# Altium PCB Send_Medicine_Motor.PcbDoc (part 3 of 5)
Units mm, origin at the board's own origin, x right, y up, seen from the top; angles counter-clockwise.
Board outline 150.04 x 100.2 mm, 2 copper layers (Top Layer, Bottom Layer); 273 components, 158 nets, 892 pads, 508 vias.
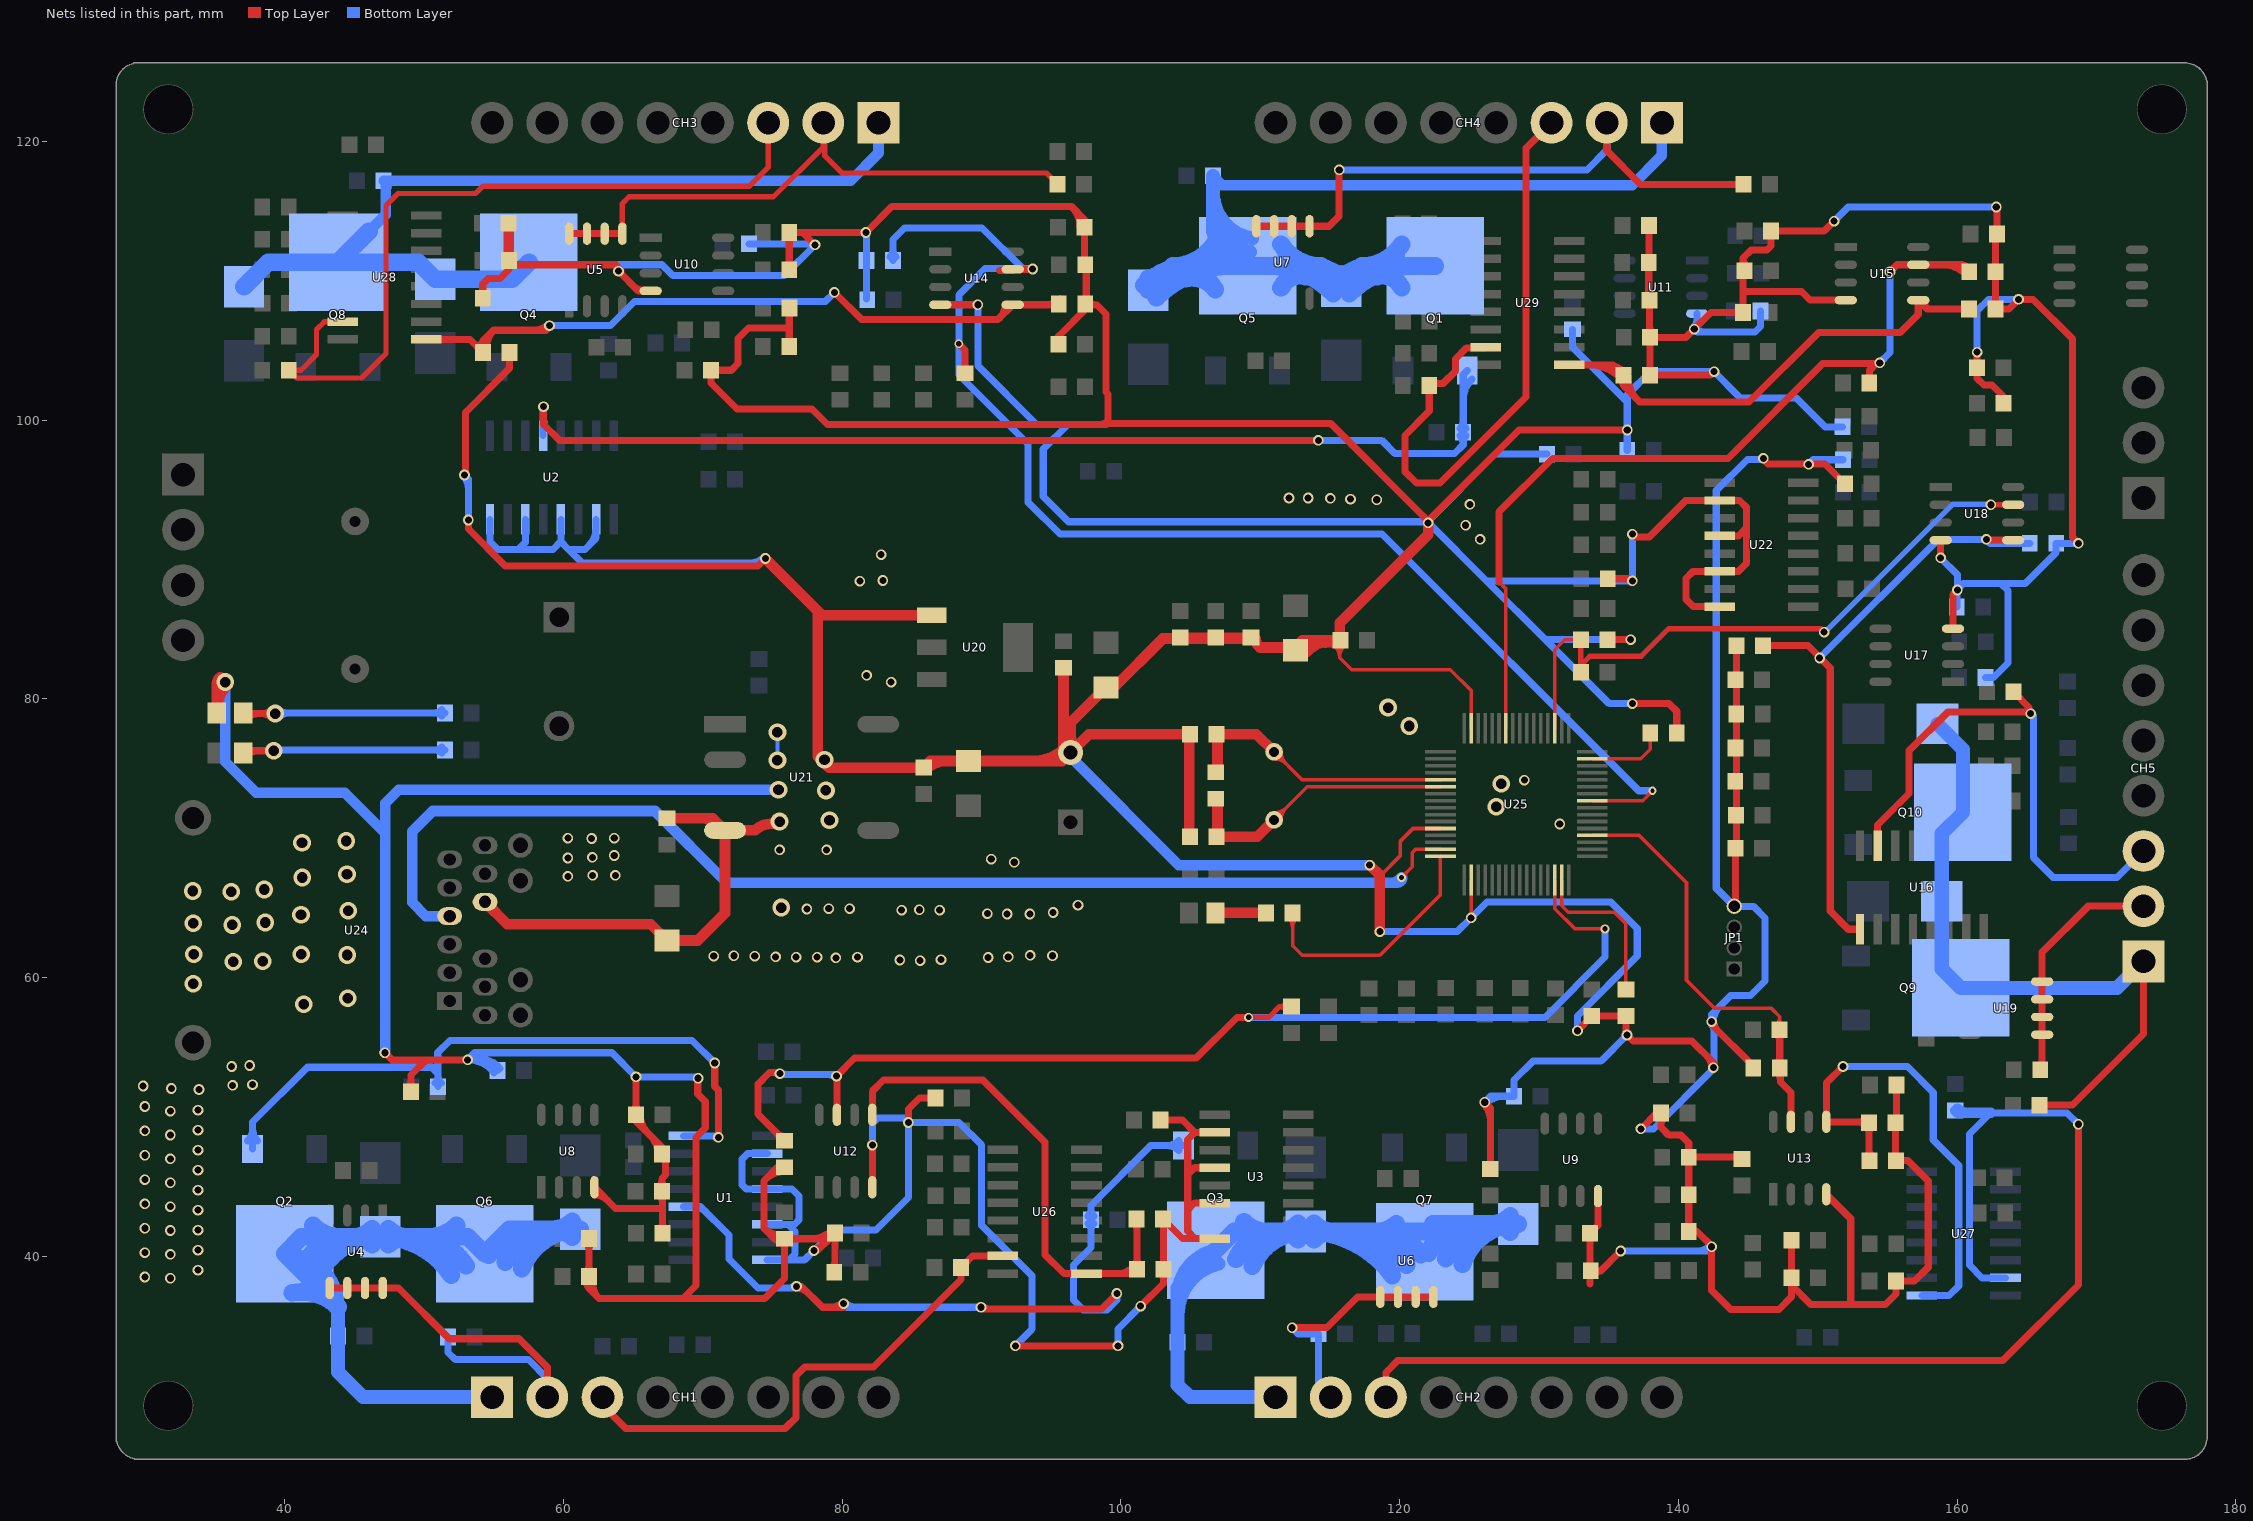
[diagram p3: the nets of this part, all layers, seen from the top]

## Via types
v1: diameter 0.762, hole 0.508, Top Layer to Bottom Layer, 415 vias
v2: diameter 1.27, hole 0.762, Top Layer to Bottom Layer, 47 vias
v3: diameter 0.635, hole 0.381, Top Layer to Bottom Layer, 43 vias
v4: diameter 3.4, hole 3.4, Top Layer to Bottom Layer, 2 vias
v5: diameter 0.6, hole 0.3, Top Layer to Bottom Layer, 1 vias

## Nets (pads, with @x,y where several pads share a name; then routed paths per layer and width w, separated by ;. In a path a pad name is that pad's centre, name@x,y a point inside that pad or via, vN(x,y) a via of type N, cw(c..) or ccw(c..) an arc to the next point about the centre after c; other vN are vias at no path point) (continued)
GND: C1.1 C2.1 C3.1 C4.1 C5.1 C6.1 C7.1 C8.1 C11.1 C12.2 C14.2 C15.1 C16.2 C17.1 C18.1 C19.1 C20.2 C21.1 C22.2 C23.1 C24.1 C25.1 C34.1 C35.1 C36.1 C37.1 C38.1 C39.1 C40.1 C41.1 C42.1 C43.1 C44.1 C45.1 C46.1 C47.1 C48.1 C49.1 C50.1 C51.1 C52.1 C53.1 C54.1 C55.1 C56.1 C57.1 C58.1 C59.1 C60.1 C61.1 C62.1 C63.1 C64.1 C65.1 C66.1 C67.1 C76.1 C77.1 C78.1 C79.1 C80.1 C81.2 C82.1 C83.1 C84.1 JP1.4 LED1.2 R20.2 R24.2 R25.2 R33.2 R34.2 R35.2 R36.2 R45.2 R46.2 R47.2 R48.2 R49.2 R50.2 R51.2 R52.2 R57.2 R58.2 R59.2 R60.2 R69.2 R70.2 R71.2 R72.2 R73.2 R74.2 R75.2 R76.2 R80.2 R82.2 R85.2 R91.1 R94.1 U1.2 U1.4 U1.6 U1.8 U2.2 U2.4 U2.6 U2.8 U3.2 U3.4 U3.6 U3.8 U8.4 U9.4 U10.4 U11.4 U12.4 U13.4 U14.4 U15.4 U17.4 U18.4 U20.1 U21.4 U22.2 U22.4 U22.6 U22.8 U24.10 U25.12 U25.18 U25.63 | length 1308.1
  Top Layer w0.254: R91.1@115.383,83.76 cw(c114.624,83.001) 115.697,83.001 cw(c116.77,83.001) R91.1@116.011,83.76 ; R91.1@115.697,84.201 115.697,82.956 116.561,82.093 123.647,82.093 125.136,80.604 U25.63@125.136,77.9 ; 118.593,67.285 120.066,68.758 120.066,69.799 120.967,70.7 U25.12@122.936,70.7 ; v1(125.136,64.287) U25.18@125.136,67
  Top Layer w0.508: v1(47.193,54.61) 47.701,54.102 v1(53.137,54.102) ; C39.1@48.839,52.069 ccw(c48.3,52.609) 49.063,52.609 ccw(c49.825,52.609) C39.1@49.286,52.069 ; C39.1@49.063,51.816 49.063,53 50.165,54.102 ; v1@52.818,96.153 ccw(c52.418,96.553) 52.984,96.553 ; v1(52.908,96.063) 52.984,96.139 52.984,100.559 56.144,103.718 R75.2@56.144,104.851 ; v1(53.188,92.837) 53.188,92.177 55.829,89.535 73.965,89.535 v1(74.498,90.068) ; R59.2@53.995,108.991 ccw(c53.456,109.53) 54.219,109.53 ccw(c54.982,109.53) R59.2@54.442,108.991 ; R59.2@54.219,108.737 54.219,109.769 54.61,110.16 55.448,110.16 56.093,110.805 R51.2@56.093,111.455 56.398,111.15 63.741,111.15 v1@64.143,110.748 ; C56.1@61.61,38.304 cw(c61.071,37.764) 61.834,37.764 cw(c62.597,37.764) C56.1@62.057,38.304 ; C56.1@61.61,38.811 ccw(c61.071,39.35) 61.834,39.35 ccw(c62.597,39.35) C56.1@62.057,38.811 ; R33.2@61.61,41.022 cw(c61.071,40.482) 61.834,40.482 cw(c62.597,40.482) R33.2@62.057,41.022 ; C56.1@61.647,38.571 ccw(c62.628,38.34) 61.915,37.627 ; R33.2@61.834,41.275 C56.1@61.834,38.557 61.834,37.709 62.56,36.982 ; C56.1@62.141,38.455 ccw(c63.672,38.094) 62.56,36.982 ; U8.4@62.23,44.412 cw(c62.23,43.094) 63.162,44.026 ; U8.4@62.23,44.92 cw(c62.23,44.828) U8.4@62.295,44.893 ; U8.4@62.23,44.958 63.754,43.434 66.99,43.434 67.117,43.561 ; v1(63.957,110.693) 65.38,109.271 U10.4@66.269,109.271 ; C1.1@64.994,50.418 ccw(c64.454,50.958) 65.217,50.958 ccw(c65.98,50.958) C1.1@65.44,50.418 ; 65.026,109.624 ccw(c65.769,110.367) U10.4@65.769,109.317 ; v1@65.227,52.883 v1(65.217,52.873) C1.1@65.217,50.165 65.217,49.693 67.092,47.818 C64.1@67.092,47.346 67.335,47.102 67.335,45.827 67.066,45.558 R47.2@67.066,44.679 67.117,44.628 67.117,43.561 ; C1.1@65.533,50.135 ccw(c67.364,50.135) 66.069,48.84 ; 66.239,48.67 cw(c64.945,47.376) C64.1@66.776,47.376 ; R47.2@66.843,44.425 cw(c66.181,43.763) 67.117,43.763 ; R47.2@66.843,44.932 ccw(c66.303,45.471) 67.066,45.471 ccw(c67.829,45.471) R47.2@67.29,44.932 ; R45.2@66.894,41.909 ccw(c66.354,42.449) 67.117,42.449 ccw(c67.88,42.449) R45.2@67.34,41.909 ; R45.2@67.117,41.656 67.117,43.561 ; 67.117,44.008 cw(c67.706,44.008) R47.2@67.29,44.425 ; v1(69.672,52.781) 69.647,52.756 69.647,51.638 70.18,51.105 70.18,49.2 69.52,48.539 69.52,37.897 68.605,36.982 ; 74.51,45.529 cw(c75.84,44.199) C47.1@75.84,46.08 ; 75.085,41.324 ccw(c75.716,41.955) C49.1@75.874,41.076 ; C49.1@75.602,41.057 ccw(c75.143,40.656) 75.143,41.265 ; C49.1@75.602,41.473 cw(c75.143,41.874) 75.143,41.265 ; C49.1@75.646,41.041 cw(c75.107,40.502) 75.87,40.502 cw(c76.633,40.502) C49.1@76.093,41.041 ; C49.1@75.784,41.576 cw(c75.508,43.123) 74.397,42.012 ; C47.1@75.87,46.396 75.377,46.396 74.397,45.415 74.397,42.012 ; C49.1@76.123,41.041 cw(c76.663,40.502) 76.663,41.265 cw(c76.663,42.028) C49.1@76.123,41.488 ; C42.1@76.21,105.283 76.21,106.604 ; C66.1@76.21,108.077 76.21,106.604 ; C45.1@76.21,110.795 C3.1@76.21,113.462 77.165,113.462 ; 77.796,41.265 ccw(c77.796,43.348) C60.1@79.268,41.875 ; v1(77.978,40.411) 78.222,40.411 C60.1@79.075,41.265 ; v1@77.978,40.538 ccw(c77.978,41.434) 78.611,40.801 ; v1(78.054,112.573) 77.165,113.462 ; 78.901,41.091 cw(c79.492,40.5) C60.1@79.492,41.335 ; C60.1@78.974,41.163 ccw(c78.485,41.651) C60.1@79.176,41.651 ; C60.1@79.022,41.265 ccw(c79.022,42.121) C60.1@79.628,41.516 ; R57.2@79.218,39.115 ccw(c78.555,39.778) 79.492,39.778 ; C60.1@79.268,41.428 cw(c78.729,40.889) 79.492,40.889 cw(c80.255,40.889) C60.1@79.715,41.428 ; R57.2@79.441,38.862 79.492,38.913 C60.1@79.492,41.681 C60.1@79.075,41.265 ; 79.492,39.532 ccw(c80.081,39.532) R57.2@79.664,39.115 ; v1@82.042,48.108 v1(82.169,47.981) U12.4@82.169,44.958 ; v1(84.76,49.606) 84.76,50.571 85.547,51.359 C5.1@86.705,51.359 ; U14.4@87.046,108.28 v1(89.738,108.28) ; v1(92.431,33.579) v1(99.797,33.579) ; R71.2@95.327,105.465 cw(c96.177,105.465) 95.576,106.066 ; R71.2@95.519,106.009 C78.1@97.521,108.011 ; 96.488,115.298 cw(c95.063,113.873) C62.1@97.078,113.873 ; C7.1@97.394,111.201 C62.1@97.394,113.843 97.394,114.391 96.444,115.341 83.591,115.341 v1(81.712,113.462) 77.165,113.462 ; 97.521,108.94 ccw(c98.024,108.94) C78.1@97.668,108.584 ; C7.1@97.521,111.15 97.521,108.255 98.298,108.255 ; C78.1@97.668,108.078 cw(c98.096,107.65) 98.096,108.255 ; C78.1@97.672,108.521 ccw(c98.298,109.125) 98.298,108.255 ; 98.569,99.695 ccw(c98.569,100.262) 98.97,99.861 ; v1(101.422,36.424) 103.058,38.059 R73.2@103.058,39.065 103.058,42.647 104.43,41.275 105.334,41.275 ; R73.2@102.835,38.812 cw(c102.295,38.272) 103.058,38.272 cw(c103.821,38.272) R73.2@103.281,38.812 ; R69.2@102.855,49.784 104.419,49.784 105.308,48.895 ; U3.8@106.728,41.275 105.334,41.275 ; U3.6@106.728,43.815 105.283,43.815 104.8,43.332 ; U3.4@106.728,46.355 105.283,46.355 104.8,45.872 ; U3.2@106.728,48.895 105.308,48.895 ; 121.74,93.067 cw(c121.307,92.634) 121.92,92.634 v1@122.047,92.761 ; v1@126.021,50.964 cw(c124.823,49.766) 126.517,49.766 ; v1@126.102,50.927 cw(c126.068,50.479) 126.517,50.479 ; v1(126.111,51.054) 126.517,50.648 C40.1@126.517,46.264 ; v1(132.766,56.185) 133.782,57.201 R94.1@133.782,57.241 C82.1@136.246,57.241 v1@136.246,56.136 ; 133.665,38.009 R34.2@133.665,41.656 134.239,42.23 U9.4@134.239,44.323 ; C57.1@133.716,38.802 ccw(c133.716,40.164) 134.679,39.201 ; 134.442,38.964 v1(135.865,40.386) ; C38.1@134.91,84.252 v1(136.576,84.252) ; C35.1@134.935,88.621 136.55,88.621 v1(136.703,88.468) ; v1(136.322,55.88) 136.754,55.448 140.97,55.448 142.519,53.899 v1(142.519,53.543) ; v1(136.337,99.289) 128.575,99.289 v1@122.047,92.761 ; v1(136.703,79.654) 139.344,79.654 139.888,79.111 C81.2@139.888,77.546 ; v1(136.703,91.821) 136.906,91.618 137.922,91.618 140.538,94.234 U22.2@142.974,94.234 144.399,94.234 144.882,93.751 144.882,92.253 ; v1(137.312,49.149) 138.455,50.292 C2.1@138.75,50.292 138.75,49.261 139.319,48.692 140.183,48.692 140.752,48.123 R48.2@140.752,47.117 ; C59.1@137.907,113.97 137.907,111.328 R36.2@137.881,111.303 137.881,108.661 R52.2@137.932,108.61 R60.2@137.932,105.994 ; 137.932,106.859 ccw(c138.869,106.859) R60.2@138.206,106.197 ; R76.2@137.958,103.226 142.316,103.226 v1(142.57,103.48) ; R76.2@137.983,103.251 R60.2@137.983,105.943 140.564,105.943 v1(141.148,106.528) 142.342,107.721 R72.2@144.643,107.721 144.643,109.245 ; R46.2@140.752,41.945 cw(c140.752,40.889) 141.498,41.636 ; 142.051,54.367 cw(c141.227,53.543) v1@142.392,53.543 ; v1(142.392,56.845) 142.392,56.642 145.379,53.655 C48.1@145.379,53.518 ; v1@142.519,56.845 ccw(c143.317,56.845) 142.753,56.282 ; U22.8@142.974,86.614 141.097,86.614 140.564,87.147 140.564,88.646 141.072,89.154 U22.6@142.974,89.154 144.323,89.154 144.882,89.713 144.882,92.253 ; U22.4@142.974,91.694 144.323,91.694 144.882,92.253 ; JP1.4@144.018,65.115 144.109,65.206 C25.1@144.109,69.291 144.186,69.367 R85.2@144.186,83.82 ; C50.1@144.435,47.117 R48.2@140.752,47.117 ; C63.1@144.943,110.994 cw(c145.451,111.623) 144.643,111.623 ; v1(146.101,97.257) 146.101,97.18 146.431,96.85 150.536,96.85 C34.1@151.958,95.428 ; C61.1@148.123,41.148 R58.2@148.123,38.456 R58.2@148.123,37.932 ; U13.4@150.622,44.45 152.375,42.697 152.375,36.576 152.4,36.551 ; v1(151.181,114.275) 150.47,113.563 C4.1@146.644,113.563 146.644,112.507 146.355,112.217 145.237,112.217 144.643,111.623 ; U15.4@152.019,108.61 149.454,108.61 148.844,109.22 144.668,109.22 144.643,109.245 ; R74.2@155.585,46.888 C77.1@155.585,49.581 155.661,49.657 C6.1@155.661,52.299 ; R74.2@155.611,46.863 156.489,46.863 157.937,45.415 157.937,39.218 156.947,38.227 R70.2@155.611,38.227 155.611,37.297 154.864,36.551 152.4,36.551 ; v1(158.826,90.119) U18.4@158.826,91.389 ; U17.4@159.715,85.039 159.715,87.503 v1(160.02,87.808) ; v1(161.442,104.877) 161.432,104.866 C36.1@161.432,103.759 161.432,103.007 161.925,102.514 162.509,102.514 163.332,101.691 R82.2@163.332,101.219 ; v1@162.724,115.201 cw(c162.36,114.837) 162.875,114.837 ; v1(162.814,115.291) 162.875,115.23 C8.1@162.875,113.36 162.773,113.259 C54.1@162.773,110.642 162.748,110.617 C79.1@162.748,107.975 163.728,107.975 v1(164.414,108.661) 165.456,108.661 168.3,105.816 168.3,91.567 v1(168.707,91.161) ; 62.56,36.982 68.605,36.982 ; 68.605,36.982 74.447,36.982 75.87,38.405 C49.1@75.87,41.265 ; 74.397,42.012 75.143,41.265 ; 75.143,41.265 C49.1@75.87,41.265 ; C49.1@75.87,41.265 C60.1@79.075,41.265 ; 76.21,106.604 73.279,106.604 72.542,105.867 72.542,104.064 72.06,103.581 R49.2@70.597,103.581 70.597,102.657 72.466,100.787 77.851,100.787 78.943,99.695 98.984,99.695 99.06,99.771 ; 98.298,108.255 98.933,107.62 98.933,102.012 99.085,101.86 99.085,99.797 99.06,99.771 ; 99.06,99.771 115.037,99.771 v1@122.047,92.761 ; 104.8,43.332 104.8,41.808 105.334,41.275 ; 104.8,43.332 104.8,45.872 ; 104.8,45.872 104.8,48.387 105.308,48.895 ; R48.2@140.752,47.117 C65.1@140.752,44.425 R46.2@140.752,41.783 141.351,41.783 142.443,40.691 v1(142.392,40.691) 142.392,37.567 143.764,36.195 147.218,36.195 148.123,37.099 R58.2@148.123,37.932 ; 144.643,109.245 144.643,111.623 ; R58.2@148.123,37.932 149.504,36.551 152.4,36.551
  Top Layer w0.762: LED1.2@35.133,78.994 35.133,80.945 35.128,80.95 35.382,81.204 v2(35.738,81.204) ; LED1.2@35.133,79.131 cw(c37.811,79.131) v2@35.917,81.024 ; 35.133,80.971 cw(c35.971,80.971) v2@35.379,81.563 ; U24.10@54.381,65.43 55.982,63.83 66.269,63.83 C22.2@67.437,62.662 69.647,62.662 71.603,64.618 U21.4@71.603,70.561 ; R35.2@56.068,114.122 56.093,114.097 R51.2@56.093,111.455 ; C21.1@67.437,71.435 70.729,71.435 U21.4@71.603,70.561 ; 69.904,71.435 cw(c69.904,69.763) U21.4@71.087,70.945 ; v1(74.498,90.068) 78.268,86.299 ; v2@75.434,70.955 ccw(c74.916,69.407) 73.762,70.561 U21.4@71.603,70.561 ; C11.1@86.016,74.934 cw(c87.478,73.471) 87.478,75.539 ; U20.1@86.435,85.993 78.574,85.993 78.268,86.299 ; 93.677,75.539 ccw(c93.677,78.861) 96.026,76.512 ccw(c95.14,77.398) 96.393,77.398 ccw(c97.646,77.398) 96.76,76.512 cw(c98.872,78.625) 95.885,78.625 ; C12.2@95.787,75.539 C14.2@89.078,75.539 86.324,75.539 C11.1@85.852,75.067 79.066,75.067 78.268,75.866 78.268,86.299 ; C12.2@95.885,76.653 C15.1@95.885,82.235 ; C17.1@104.267,84.394 C18.1@106.807,84.394 C19.1@109.347,84.394 109.598,84.394 109.664,84.328 ccw(c110.431,84.328) 109.889,83.786 ; C24.1@104.902,70.104 104.902,77.47 97.718,77.47 C12.2@96.393,76.145 96.393,78.283 C16.2@98.933,80.823 99.517,80.823 103.022,84.328 C19.1@109.347,84.328 ; 109.985,83.69 112.522,83.69 113.033,84.201 115.697,84.201 115.697,85.446 122.047,91.796 v1(122.047,92.634) ; C20.2@113.368,83.394 cw(c115.317,81.445) R91.1@115.317,84.201 ; 114.68,84.03 cw(c114.995,82.857) R91.1@115.602,83.909 ; v1(117.856,68.072) 118.593,67.335 118.593,67.285 v1(118.593,63.297)
  Bottom Layer w0.305: v2(75.362,75.59) v2(75.362,77.597)
  Bottom Layer w0.508: v1@52.818,95.973 cw(c51.927,95.082) 53.188,95.082 ; v1(52.908,96.063) 53.188,95.783 v1(53.188,92.837) ; 54.178,54.102 cw(c54.178,52.505) C41.1@55.437,53.488 ; 54.695,53.931 ccw(c55.286,54.521) C41.1@55.286,53.686 ; U2.8@54.737,92.885 54.737,91.288 55.296,90.729 56.769,90.729 ; C41.1@54.767,53.858 cw(c54.279,53.37) C41.1@54.97,53.37 ; C41.1@55.037,53.175 ccw(c53.137,51.691) v1(53.137,54.102) ; C41.1@55.286,53.34 54.524,54.102 v1(53.137,54.102) ; U2.6@57.277,92.885 57.277,91.237 56.769,90.729 ; U2.4@59.817,92.885 59.817,91.288 ; 61.894,91.079 ccw(c60.888,92.085) U2.2@62.311,92.085 ; U2.2@62.357,92.885 62.357,91.542 61.544,90.729 60.376,90.729 ; v1(63.957,110.693) 63.957,111.15 67.081,111.15 67.869,110.363 75.844,110.363 v1(78.054,112.573) 77.978,112.649 C58.1@73.315,112.649 ; 69.145,52.873 cw(c69.145,52.254) v1@69.582,52.691 ; v1(69.672,52.781) 69.581,52.873 v1(65.217,52.873) 63.48,54.61 53.645,54.61 v1(53.137,54.102) ; 73.456,89.764 ccw(c73.456,91.111) v1@74.408,90.158 ; v1@74.374,90.095 cw(c73.965,90.182) 73.965,89.764 ; v1@74.483,89.942 ccw(c74.407,89.321) 73.965,89.764 ; v1(74.498,90.068) 74.27,90.068 73.965,89.764 ; U1.8@74.628,39.751 76.225,39.751 ; U1.6@74.628,42.291 76.124,42.291 ; U1.2@74.628,47.371 73.228,47.371 72.822,46.965 72.822,45.136 73.127,44.831 U1.4@74.628,44.831 76.403,44.831 76.911,44.323 76.911,42.621 76.581,42.291 76.124,42.291 ; 77.564,112.649 cw(c77.564,112.082) v1@77.964,112.483 ; v1@81.622,113.372 cw(c81.307,113.057) 81.752,113.057 ; v1(81.712,113.462) 81.752,113.421 C53.1@81.752,111.455 C51.1@81.752,108.687 ; v1(82.169,47.981) 82.169,49.53 82.575,49.936 84.43,49.936 v1(84.76,49.606) ; v1(89.738,108.28) 89.738,103.911 93.955,99.695 96.215,99.695 94.437,97.917 94.437,94.513 96.241,92.71 121.996,92.71 126.848,97.561 C43.1@130.571,97.561 ; v1(92.431,33.579) 93.624,34.773 93.624,38.608 90.018,42.215 90.018,47.981 88.392,49.606 v1(84.76,49.606) ; v1(99.797,33.579) 99.797,34.798 v1(101.422,36.424) ; v1(118.593,63.297) 124.145,63.297 v1(125.136,64.287) 126.279,65.43 135.153,65.43 137.058,63.525 137.058,61.544 132.766,57.252 v1(132.766,56.185) ; v1@122.06,92.647 126.238,88.468 ; v1(126.111,51.054) 126.543,51.486 C44.1@128.209,51.486 128.209,52.644 129.591,54.026 134.468,54.026 v1(136.322,55.88) ; v1@126.201,50.964 cw(c127.46,49.705) 127.46,51.486 ; C67.1@132.41,106.517 132.41,105.232 136.337,101.305 ; v1(135.865,40.386) 142.088,40.386 v1(142.392,40.691) ; C46.1@136.337,97.841 v1(136.337,99.289) 136.337,101.305 ; v1(136.576,84.252) 130.454,84.252 ; v1(136.703,79.654) 135.052,79.654 130.454,84.252 ; v1(136.703,91.821) v1(136.703,88.468) 126.238,88.468 ; v1(137.312,49.149) 138.227,49.149 142.57,53.492 142.57,56.667 v1(142.392,56.845) 142.392,57.353 143.764,58.725 145.186,58.725 146.228,59.766 146.228,64.287 145.4,65.115 JP1.4@144.018,65.115 142.723,66.41 142.723,94.945 144.958,97.18 146.101,97.18 v1(146.101,97.257) ; v1@141.058,106.617 ccw(c140.351,107.325) 141.351,107.325 ; v1@141.238,106.617 ccw(c141.945,107.325) 141.945,106.324 ; 141.35,40.386 ccw(c141.35,41.733) v1@142.303,40.781 ; U11.4@141.351,107.645 141.351,106.731 v1(141.148,106.528) 141.351,106.324 145.517,106.324 145.908,106.716 R50.2@145.908,107.823 ; v1@142.303,56.755 cw(c141.657,56.109) 142.57,56.109 ; v1@142.519,56.845 cw(c144.052,56.845) 142.968,57.929 ; v1(149.352,96.825) 149.682,97.155 C80.1@151.831,97.155 ; v1(151.181,114.275) 152.197,115.291 v1(162.814,115.291) ; C52.1@151.78,99.517 150.546,99.517 148.463,101.6 144.45,101.6 v1(142.57,103.48) 137.998,103.48 136.337,101.818 136.337,101.305 ; v1(158.826,90.119) 160.02,88.925 v1@160.02,87.859 ; R24.2@159.984,86.589 159.984,87.823 v1@160.02,87.859 ; v1(160.02,87.808) v1@160.02,87.859 ; v1(161.442,104.877) 161.442,107.848 162.255,108.661 v1(164.414,108.661) ; C83.1@162.037,81.534 162.611,81.534 163.652,82.575 163.652,87.782 163.17,88.265 ; v1(168.707,91.161) C84.1@167.117,91.161 167.117,90.51 164.871,88.265 163.17,88.265 ; 56.769,90.729 59.258,90.729 59.817,91.288 ; 59.817,91.288 60.376,90.729 ; 60.376,90.729 61.341,89.764 73.965,89.764 ; 76.124,42.291 76.632,41.783 76.632,40.157 76.225,39.751 ; 76.225,39.751 77.318,39.751 v1(77.978,40.411) 79.451,41.885 82.423,41.885 84.76,44.221 v1(84.76,49.606) ; 126.238,88.468 130.454,84.252 ; v1@160.02,87.859 160.426,88.265 163.17,88.265
  Bottom Layer w0.762: v2(35.738,81.204) 35.738,75.489 37.973,73.254 44.323,73.254 47.219,70.358 ; v1(47.193,54.61) 47.219,54.635 47.219,70.358 ; v2(75.438,73.482) 48.184,73.482 47.219,72.517 47.219,70.358 ; C12.2@96.393,76.145 96.393,75.844 104.165,68.072 v1(117.856,68.072)
  other v1: 31.801,38.427 29.972,38.521 33.782,39.014 31.801,40.14 29.972,40.267 33.782,40.45 31.801,41.854 33.782,41.885 29.972,42.014 33.782,43.32 31.801,43.567 29.972,43.761 33.782,44.755 31.801,45.28 29.972,45.508 33.782,46.19 31.801,46.993 29.972,47.255 33.782,47.625 31.801,48.706 29.972,49.002 33.782,49.06 31.801,50.419 33.782,50.495 29.972,50.749 33.858,51.968 31.877,52.045 29.845,52.222 36.271,52.273 37.694,52.324 36.195,53.619 37.49,53.696 85.598,61.214 84.15,61.265 87.097,61.29 79.553,61.417 90.475,61.443 76.708,61.468 78.207,61.468 81.102,61.468 75.235,61.493 91.923,61.493 70.79,61.544 73.736,61.544 72.238,61.57 95.098,61.57 93.497,61.595 91.846,64.567 93.472,64.567 90.424,64.592 95.148,64.668 84.277,64.846 86.995,64.846 85.547,64.872 77.47,64.922 79.045,64.948 80.543,64.948 96.926,65.202 60.325,67.259 62.103,67.335 63.729,67.335 92.354,68.275 90.703,68.504 60.325,68.58 62.078,68.631 63.652,68.758 75.514,69.164 78.892,69.164 62.027,69.977 60.325,70.002 63.652,70.002 131.496,71.018 128.956,74.168 83.515,81.204 81.763,81.686 81.28,88.443 82.931,88.494 82.804,90.348 125.781,91.44 124.739,92.456 125.044,93.955 118.364,94.285 116.484,94.336 115.037,94.386 112.065,94.412 113.436,94.412
  other v2: 41.377,58.09 44.526,58.522 33.452,59.563 36.322,61.138 38.43,61.163 44.501,61.62 33.477,61.671 41.199,61.671 36.246,63.779 33.452,63.906 38.608,63.957 41.173,64.516 44.577,64.795 75.641,65.024 36.17,66.167 33.401,66.218 38.532,66.319 41.275,67.183 44.475,67.412 41.25,69.672 44.425,69.799 75.514,71.196 79.096,71.298 126.949,72.263 78.842,73.431 127.305,73.914 78.74,75.641 120.701,78.054 119.177,79.375
K1: C76.2 R73.1 U12.5 U26.9 | length 39
  Top Layer w0.508: U12.5@82.169,50.158 82.169,51.841 82.982,52.654 90.094,52.654 94.564,48.184 94.564,40.112 95.916,38.76 U26.9@97.539,38.76 100.853,38.76 R73.1@101.158,39.065 101.158,42.647 C76.2@101.133,42.672 ; 99.732,38.76 ccw(c99.732,40.462) R73.1@100.935,39.259 ; C76.2@100.909,42.419 cw(c100.308,41.818) 101.158,41.818 ; R73.1@100.935,39.319 ccw(c100.395,39.858) 101.158,39.858 ccw(c101.921,39.858) R73.1@101.381,39.319 ; 101.158,41.94 cw(c101.834,41.94) C76.2@101.356,42.419
K2: C77.2 R74.1 U13.5 U27.9 | length 38.7
  Top Layer w0.508: v1(151.816,53.619) 150.622,52.426 U13.5@150.622,49.65 153.616,49.65 C77.2@153.685,49.581 153.685,46.888 R74.1@153.711,46.863 ; 152.828,49.65 cw(c152.828,48.753) C77.2@153.462,49.387 ; 153.017,49.65 ccw(c153.017,50.279) C77.2@153.462,49.834 ; C77.2@153.462,49.327 cw(c152.922,48.788) 153.685,48.788 cw(c154.448,48.788) C77.2@153.909,49.327 ; R74.1@153.487,47.116 ccw(c153.009,47.595) 153.685,47.595 ; 153.685,47.717 ccw(c154.535,47.717) R74.1@153.934,47.116
  Bottom Layer w0.508: v1(151.816,53.619) 156.439,53.619 158.293,51.765 158.293,48.336 160.122,46.507 160.122,37.871 159.436,37.186 U27.9@157.477,37.186
K3: C78.2 R75.1 U14.5 U28.9 | length 58.4
  Top Layer w0.508: U28.9@50.168,105.791 53.304,105.791 R75.1@54.244,104.851 54.244,105.705 54.991,106.451 ; 53.654,105.442 ccw(c54.244,106.033) R75.1@54.244,105.197 ; R75.1@53.726,105.369 cw(c53.238,104.881) R75.1@53.928,104.881 ; R75.1@54.021,105.105 ccw(c53.481,105.644) 54.244,105.644 ccw(c55.007,105.644) R75.1@54.468,105.105 ; R75.1@54.057,104.84 cw(c55.069,105.063) 54.336,105.796 ; R75.1@54.553,104.949 cw(c56.142,105.301) 54.991,106.451 ; 57.9,106.451 ccw(c57.9,107.885) v1@58.914,106.871 ; v1@58.877,106.777 cw(c58.443,106.759) 58.75,106.451 ; v1@59.004,106.705 58.75,106.451 ; v1(79.451,109.169) 81.407,107.213 91.179,107.213 U14.5@92.246,108.28 95.189,108.28 C78.2@95.621,108.712 ; 91.314,107.348 ccw(c90.382,108.28) U14.5@91.7,108.28 ; U14.5@92.181,108.215 ccw(c92.116,108.28) U14.5@92.208,108.28 ; 94.731,108.28 ccw(c94.731,109.114) C78.2@95.321,108.524 ; 94.832,108.28 cw(c94.832,107.588) C78.2@95.321,108.078 ; 54.991,106.451 58.75,106.451
  Bottom Layer w0.508: v1(59.004,106.782) 63.373,106.782 65.1,108.509 78.791,108.509 v1(79.451,109.169)
K4: C79.2 R76.1 U15.5 U29.9 | length 44.8
  Top Layer w0.508: U29.9@132.184,103.962 135.321,103.962 R76.1@136.058,103.226 136.058,102.474 ; 133.589,103.962 cw(c133.589,100.787) R76.1@135.834,103.032 ; 134.815,103.962 cw(c134.815,102.013) R76.1@136.193,103.391 ; 135.467,103.816 ccw(c136.058,104.407) R76.1@136.058,103.572 ; R76.1@135.539,103.744 cw(c135.051,103.256) R76.1@135.742,103.256 ; R76.1@135.843,102.963 cw(c135.391,102.474) 136.058,102.474 ; R76.1@135.866,103.196 ccw(c137.145,103.196) 136.24,102.291 ; R76.1@136.272,102.963 ccw(c136.724,102.474) 136.058,102.474 ; R76.1@136.374,103.196 ccw(c138.879,103.196) 137.107,101.424 ; U15.5@157.76,108.589 ccw(c158.225,108.346) 157.854,107.975 ; C79.2@160.848,107.975 157.854,107.975 ; 136.058,102.474 137.236,101.295 145.085,101.295 150.063,106.274 155.905,106.274 157.219,107.587 U15.5@157.219,108.61 U15.5@157.365,108.465 ; U15.5@157.365,108.465 157.854,107.975 ; U15.5@157.365,108.465 157.854,107.975
K5: C84.2 R85.1 U16.9 U18.5 | length 46.3
  Top Layer w0.508: R85.1@146.086,83.82 149.301,83.82 150.901,82.22 150.901,64.77 152.2,63.472 U16.9@153.035,63.472 ; v1(162.103,91.44) 162.154,91.389 U18.5@164.026,91.389
  Bottom Layer w0.508: v1(150.139,82.931) 158.648,91.44 v1(162.103,91.44) 162.382,91.161 C84.2@165.217,91.161
KIN1: CH1.3 R61.2 U26.7 | length 37.3
  Top Layer w0.508: CH1.3@62.809,29.896 62.809,29.316 64.465,27.661 75.921,27.661 76.708,28.448 76.708,31.445 77.318,32.055 82.245,32.055 88.529,38.339 88.529,38.906 R61.2@88.845,39.222 ; R61.2@88.702,39.365 89.367,40.03 U26.7@91.539,40.03
KIN2: CH2.3 R62.2 U27.7 | length 90.2
  Top Layer w0.508: CH2.3@119.02,29.896 119.02,31.669 119.863,32.512 163.271,32.512 168.707,37.948 v1(168.707,49.479)
  Bottom Layer w0.508: U27.7@163.477,38.456 161.798,38.456 160.884,39.37 160.884,48.768 162.408,50.292 167.894,50.292 v1(168.707,49.479)
  Bottom Layer w0.762: R62.2@159.868,50.46 160.035,50.292 162.408,50.292 ; R62.2@160.031,50.593 ccw(c160.759,51.321) 160.759,50.292
KIN3: CH3.3 R65.2 U28.7 | length 56.7
  Top Layer w0.381: U28.7@44.168,107.061 42.85,107.061 42.291,106.502 42.291,104.699 41.173,103.581 R65.2@40.295,103.581 40.853,103.022 45.517,103.022 47.269,104.775 47.269,115.392 48.133,116.256 53.696,116.256 54.229,116.789 73.355,116.789 74.695,118.129 CH3.3@74.695,121.336
KIN4: CH4.3 R66.2 U29.7 | length 44.7
  Top Layer w0.508: R66.2@122.032,102.641 123.139,102.641 124.003,103.505 124.003,104.394 124.79,105.181 126.134,105.181 U29.7@126.184,105.232 ; R66.2@122.133,102.489 122.133,100.645 120.396,98.908 120.396,96.291 121.209,95.479 122.911,95.479 129.083,101.651 129.083,119.513 CH4.3@130.905,121.336
KIN5: CH5.3 R83.2 U16.7 | length 38.9
  Top Layer w0.508: U16.7@154.305,69.472 154.305,70.942 156.566,73.203 156.566,76.276 159.334,79.045 165.176,79.045 165.176,79.385 R83.2@164.043,80.518
  Bottom Layer w0.508: v1@165.481,78.816 165.481,68.605 166.903,67.183 171.48,67.183 CH5.3@173.38,69.083
  other v1: 165.278,78.943
KOUT1: C47.2 R109.2 U12.7 U25.30 | length 88.6
  Top Layer w0.254: U25.30@131.136,67 131.136,64.952 132.588,63.5 v3(134.747,63.5) ; v3@134.612,63.365 ccw(c134.287,63.04) 134.287,63.5 ccw(c134.287,63.96) v3@134.612,63.635
  Top Layer w0.381: v3(109.169,57.15) 110.617,57.15 111.389,57.922 ; R109.2@111.924,57.676 ccw(c111.389,57.219) 111.389,57.922 ; R109.2@111.924,58.169 cw(c111.389,58.626) 111.389,57.922 ; R109.2@112.243,57.922 111.389,57.922
  Top Layer w0.508: 75.049,53.188 cw(c75.049,52.621) v1@75.45,53.022 ; 75.279,48.886 cw(c74.688,48.296) C47.2@75.524,48.296 ; C47.2@75.352,48.814 ccw(c75.84,49.302) C47.2@75.84,48.612 ; v1(75.54,53.111) 75.463,53.188 74.803,53.188 73.965,52.349 73.965,50.201 C47.2@75.87,48.296 ; U12.7@79.629,50.158 79.629,52.959 80.899,54.229 105.41,54.229 108.331,57.15 v3(109.169,57.15)
  Bottom Layer w0.508: v1(75.54,53.111) 75.616,53.035 79.502,53.035 v1(79.604,52.934) ; v1@75.629,53.201 ccw(c76.03,53.602) 76.03,53.035 ; 79.052,53.035 cw(c79.052,52.382) v1@79.514,52.844 ; v3(109.169,57.15) 130.429,57.15 134.747,61.468 v3(134.747,63.5)
KOUT2: C48.2 R108.2 U13.7 U25.36 | length 35
  Top Layer w0.254: U25.36@133.836,70.2 137.191,70.2 140.589,66.802 140.589,59.817 142.621,57.785 146.685,57.785 147.279,57.191 ; R108.2@147,56.654 ccw(c146.624,57.191) 147.279,57.191 ; R108.2@147.279,56.048 147.279,57.191
  Top Layer w0.508: R108.2@147.031,56.008 cw(c146.43,55.407) 147.279,55.407 ; C48.2@147.056,53.264 cw(c146.394,52.602) 147.33,52.602 ; C48.2@147.056,53.771 ccw(c146.517,54.311) 147.279,54.311 ccw(c148.042,54.311) C48.2@147.503,53.771 ; C48.2@147.279,53.518 R108.2@147.279,56.048 ; 147.279,55.529 cw(c147.956,55.529) R108.2@147.477,56.008 ; 147.33,52.848 cw(c147.92,52.848) C48.2@147.503,53.264 ; C48.2@147.33,53.518 147.33,52.517 148.082,51.765 U13.7@148.082,49.65
KOUT3: C53.2 R110.2 U14.7 U25.41 | length 100.7
  Top Layer w0.254: U25.41@133.836,72.7 137.445,72.7 v5(138.151,73.406)
  Top Layer w0.508: v3(88.367,105.486) 88.824,105.029 R110.2@88.824,103.363 ; R110.2@88.6,103.586 ccw(c88.061,104.126) 88.824,104.126 ccw(c89.587,104.126) R110.2@89.047,103.586 ; 91.306,110.744 U14.7@92.246,110.744 ; 91.451,110.744 ccw(c91.451,111.115) U14.7@91.713,110.853 ; U14.7@92.246,110.82 93.65,110.82 v1(93.675,110.846)
  Bottom Layer w0.508: C53.2@83.429,111.709 ccw(c82.89,112.248) 83.652,112.248 ccw(c84.415,112.248) C53.2@83.876,111.709 ; C53.2@83.652,111.455 83.652,112.964 84.48,113.792 90.043,113.792 92.964,110.871 ; v1(93.675,110.846) 93.65,110.871 92.964,110.871 ; v5(138.151,73.406) 137.16,73.406 118.745,91.821 95.631,91.821 93.345,94.107 93.345,98.298 88.392,103.251 88.392,108.991 90.272,110.871 92.964,110.871
KOUT4: C54.2 R111.2 U15.7 U25.58 | length 64.8
  Top Layer w0.254: 127.127,88.392 127.636,87.883 U25.58@127.636,77.9
  Top Layer w0.508: 127.127,88.392 127.127,93.421 130.962,97.257 143.561,97.257 150.368,104.064 v1@154.227,104.064 ; R111.2@153.706,102.667 153.706,103.542 v1@154.227,104.064 ; v1@154.368,104.204 v1@154.227,104.064 ; v1(155.194,110.642) 155.702,111.15 U15.7@157.219,111.15 160.365,111.15 C54.2@160.873,110.642 ; 158.957,111.15 cw(c158.957,108.756) C54.2@160.65,110.449 ; 160.183,111.15 cw(c160.183,109.982) C54.2@161.009,110.808
  Bottom Layer w0.508: v1(154.457,104.115) 155.194,104.851 v1(155.194,110.642)
KOUT5: C38.2 R79.2 U18.7 U25.51 | length 46.2
  Top Layer w0.254: U25.51@131.136,77.9 131.136,83.536 131.851,84.252 C38.2@133.01,84.252
  Top Layer w0.381: R79.2@133.01,81.915 R79.2@133.01,82.413 ; C38.2@133.01,84.252 R79.2@133.01,82.413 ; v1(150.47,84.785) 150.216,85.039 139.319,85.039 137.338,83.058 133.655,83.058 R79.2@133.01,82.413 ; v1(162.429,93.929) U18.7@164.026,93.929
  Bottom Layer w0.381: v1(150.47,84.785) 150.495,84.76 159.69,93.955 162.404,93.955 v1(162.429,93.929)
LED1: C26.1 CH1.2 U4.5 U4.6 U4.7 U4.8 | length 30.5
  Top Layer w0.508: U4.5@43.231,37.726 U4.6@44.501,37.726 U4.7@45.771,37.726 U4.8@47.041,37.726 48.177,37.726 51.816,34.087 56.82,34.087 58.849,32.057 CH1.2@58.849,29.896
  Bottom Layer w0.508: C26.1@51.73,34.214 51.73,33.106 52.248,32.588 57.506,32.588 58.849,31.244 CH1.2@58.849,29.896
LED2: C32.1 CH2.2 U6.5 U6.6 U6.7 U6.8 | length 18
  Top Layer w0.508: v1(112.293,34.874) 112.319,34.9 114.783,34.9 116.974,37.091 U6.5@118.618,37.091 U6.6@119.888,37.091 U6.7@121.158,37.091 U6.8@122.428,37.091
  Bottom Layer w0.508: v1(112.293,34.874) 112.725,34.442 C32.1@114.188,34.442 114.188,30.767 CH2.2@115.06,29.896
LED3: C27.1 CH3.2 U5.5 U5.6 U5.7 U5.8 | length 43.8
  Top Layer w0.381: U5.5@64.237,113.379 64.237,115.545 64.719,116.027 75.082,116.027 78.655,119.6 CH3.2@78.655,121.336 78.765,121.226 78.765,118.948 79.985,117.729 94.656,117.729 C27.1@95.468,116.916
  Top Layer w0.508: U5.8@60.427,113.379 U5.7@61.697,113.379 U5.6@62.967,113.379 U5.5@64.237,113.379
LED4: C33.1 CH4.2 U7.5 U7.6 U7.7 U7.8 | length 44.1
  Top Layer w0.508: U7.8@109.728,113.912 U7.7@110.998,113.912 U7.6@112.268,113.912 U7.5@113.538,113.912 114.928,113.912 115.646,114.63 115.646,117.932 v1(115.672,117.958) ; CH4.2@134.865,121.336 134.865,119.338 137.287,116.916 C33.1@144.668,116.916
  Bottom Layer w0.508: v1(115.672,117.958) 133.452,117.958 134.865,119.371 CH4.2@134.865,121.336
LED5: C85.1 CH5.2 U19.5 U19.6 U19.7 U19.8 | length 17.1
  Top Layer w0.508: C85.1@165.974,53.391 166.109,53.526 U19.5@166.109,55.905 U19.6@166.109,57.175 U19.7@166.109,58.445 U19.8@166.109,59.715 166.109,61.817 169.416,65.123 CH5.2@173.38,65.123
LED_TEST: R90.1 U25.16 | length 19.5
  Top Layer w0.254: R90.1@112.016,64.3 cw(c111.26,63.544) 112.329,63.544 cw(c113.398,63.544) R90.1@112.642,64.3 ; R90.1@112.329,64.643 112.329,62.296 113.03,61.595 118.593,61.595 122.936,65.938 U25.16@122.936,68.7
M1: C29.1 CH1.1 D2.1 D6.2 Q2.2 Q6.2 | length 105
  Bottom Layer w1: Q2.2@40.005,40.192 cw(c39.887,36.25) 43.83,36.25 ; 43.83,36.367 C29.1@43.83,34.29 43.83,31.684 45.618,29.896 CH1.1@54.889,29.896
  Bottom Layer w1.27: Q2.2@40.543,37.378 cw(c41.232,33.769) 43.83,36.367 ; Q2.2@41.406,39.429 cw(c44.725,37.622) 44.725,41.402 ; Q2.2@42.031,42.218 ccw(c44.001,44.188) 44.001,41.402 ; Q2.2@42.521,38.822 cw(c46.863,36.459) D2.1@46.863,41.402 ; Q2.2@42.819,39.654 ccw(c46.428,38.965) 43.83,36.367 ; D2.1@46.287,40.826 ccw(c44.895,39.434) 44.895,41.402 ccw(c44.895,43.37) D2.1@46.287,41.978 ; D2.1@47.439,40.826 cw(c48.831,39.434) 48.831,41.402 cw(c48.831,43.37) D2.1@47.439,41.978 ; 49.198,41.402 cw(c49.198,36.853) Q6.2@53.017,39.325 ; 50.36,41.402 ccw(c50.36,44.188) Q6.2@52.33,42.218 ; Q6.2@51.951,38.635 ccw(c46.863,35.341) D2.1@46.863,41.402 ; Q6.2@54.657,40.07 cw(c57.441,38.939) Q6.2@57.441,41.944 ; Q6.2@55.834,39.592 cw(c59.327,38.173) 59.327,41.944 ; Q6.2@57.011,39.114 cw(c61.214,37.407) D6.2@61.214,41.944 56.108,41.944 Q6.2@54.356,40.192 53.146,41.402 D2.1@46.863,41.402 ; D6.2@60.638,41.368 ccw(c59.246,39.976) 59.246,41.944 ccw(c59.246,43.912) D6.2@60.638,42.52 ; 43.83,36.367 Q2.2@40.005,40.192 41.215,41.402 D2.1@46.863,41.402
M2: C30.1 CH2.1 D3.1 D7.2 Q3.2 Q7.2 | length 102.1
  Bottom Layer w1: 104.079,35.79 cw(c107.85,35.79) Q3.2@107.026,39.47 ; Q3.2@104.079,37.039 cw(c107.57,37.039) Q3.2@106.807,40.446 104.079,37.718 C30.1@104.079,33.833 104.079,30.77 104.953,29.896 CH2.1@111.1,29.896
  Bottom Layer w1.27: Q3.2@106.807,40.446 108.144,41.783 D3.1@113.284,41.783 ; Q3.2@108.264,39.796 cw(c111.326,38.429) 111.326,41.783 ; Q3.2@108.833,42.472 ccw(c110.496,44.135) 110.496,41.783 ; Q3.2@109.423,39.278 cw(c113.284,37.555) D3.1@113.284,41.783 ; D3.1@112.708,41.207 ccw(c111.316,39.815) 111.316,41.783 ccw(c111.316,43.751) D3.1@112.708,42.359 ; D3.1@113.86,41.207 cw(c115.252,39.815) 115.252,41.783 cw(c115.252,43.751) D3.1@113.86,42.359 ; 115.781,41.783 cw(c115.781,35.94) Q7.2@120.504,39.38 ; 118.277,41.783 cw(c118.277,37.758) Q7.2@121.53,40.128 ; Q7.2@118.411,41.783 ccw(c118.411,43.701) Q7.2@119.767,42.345 ; Q7.2@119.477,38.632 ccw(c113.284,34.122) D3.1@113.284,41.783 ; Q7.2@121.666,41.783 D3.1@113.284,41.783 ; Q7.2@122.102,40.217 cw(c125.014,39.259) Q7.2@125.014,42.325 ; Q7.2@122.402,42.325 Q7.2@123.164,42.325 ; Q7.2@122.428,41.783 122.525,41.686 Q7.2@123.164,42.325 ; Q7.2@123.308,39.82 cw(c126.769,38.682) 126.769,42.325 ; Q7.2@124.514,39.423 cw(c128.524,38.104) D7.2@128.524,42.325 Q7.2@123.164,42.325 ; D7.2@127.948,41.749 ccw(c126.556,40.357) 126.556,42.325 ccw(c126.556,44.293) D7.2@127.948,42.901
M3: C31.1 CH3.1 D4.1 D8.2 Q4.2 Q8.2 | length 68
  Bottom Layer w0.762: Q8.2@46.055,113.559 47.244,114.748 47.244,117.028 C31.1@47.102,117.17 80.62,117.17 82.615,119.166 CH3.1@82.615,121.336
  Bottom Layer w1.27: D8.2@37.084,109.567 38.836,111.319 Q8.2@43.815,111.319 ; Q8.2@46.055,113.559 Q8.2@43.815,111.319 ; Q4.2@57.531,111.319 56.321,110.109 D4.1@50.8,110.109 49.59,111.319 Q8.2@43.815,111.319
M4: C28.1 CH4.1 D1.1 D5.2 Q1.2 Q5.2 | length 148.3
  Bottom Layer w0.762: C28.1@106.614,117.526 107.274,116.865 136.703,116.865 138.825,118.988 CH4.1@138.825,121.336
  Bottom Layer w1: Q5.2@106.614,113.988 ccw(c109.577,113.988) Q5.2@109.093,111.065 106.614,113.544 C28.1@106.614,117.526 ; 106.614,115.167 ccw(c109.772,115.167) Q5.2@109.256,112.052 ; 106.614,116.346 ccw(c109.967,116.346) Q5.2@109.42,113.038
  Bottom Layer w1.27: D5.2@101.659,109.685 cw(c104.992,106.352) 104.992,111.065 ; D5.2@101.981,109.313 103.733,111.065 ; D5.2@101.981,110.178 ccw(c101.981,112.266) 103.458,110.79 ; D5.2@102.557,108.787 cw(c108.058,103.286) Q5.2@108.058,111.065 ; D5.2@102.796,109.363 cw(c104.643,109.363) D5.2@103.337,110.669 ; Q5.2@106.335,111.84 cw(c103.985,112.501) 104.617,110.143 cw(c105.14,108.189) Q5.2@106.776,109.379 ; Q5.2@106.711,109.473 ccw(c103.733,107.484) 103.733,111.065 ; Q5.2@106.711,112.657 cw(c103.733,114.646) 103.733,111.065 ; Q5.2@110.443,111.065 cw(c110.443,104.27) D1.1@115.248,109.075 ; Q5.2@111.498,109.508 cw(c114.36,107.656) 114.36,111.065 ; Q5.2@111.498,112.622 ccw(c114.36,114.474) 114.36,111.065 ; Q5.2@111.565,109.617 cw(c112.866,108.855) 113.256,110.311 cw(c113.754,112.171) Q5.2@111.881,111.727 ; 113.509,111.065 cw(c113.509,107.336) D1.1@116.146,109.973 ; D1.1@114.468,110.957 cw(c113.162,109.651) D1.1@115.009,109.651 ; D1.1@115.502,109.973 cw(c118.139,107.336) 118.139,111.065 ; D1.1@115.819,110.466 cw(c115.806,112.511) 114.36,111.065 ; D1.1@115.829,110.466 ccw(c115.842,112.511) 117.288,111.065 ; D1.1@116.4,109.075 cw(c121.205,104.27) Q1.2@121.205,111.065 ; D1.1@116.639,109.651 cw(c118.486,109.651) D1.1@117.18,110.957 ; Q1.2@119.767,111.727 cw(c117.894,112.171) 118.392,110.311 cw(c118.782,108.855) Q1.2@120.083,109.617 ; Q1.2@120.15,109.508 ccw(c117.288,107.656) 117.288,111.065 ; Q1.2@120.15,112.622 cw(c117.288,114.474) 117.288,111.065 ; Q1.2@122.555,111.065 117.288,111.065 ; 103.733,111.065 Q5.2@109.093,111.065 114.36,111.065 ; 114.36,111.065 D1.1@115.824,109.601 117.288,111.065
M5: C86.1 CH5.1 D9.1 D10.2 Q9.2 Q10.2 | length 49.6
  Top Layer w0.508: C86.1@165.923,50.851 168.275,50.851 173.38,55.956 CH5.1@173.38,61.163
  Bottom Layer w1.016: D10.2@158.589,78.207 160.417,76.378 Q10.2@160.417,71.857 158.902,70.342 D9.1@158.902,65.481 158.902,60.621 Q9.2@160.265,59.258 171.475,59.258 CH5.1@173.38,61.163
NET_RST: U24.4 U25.15 | length 88.6
  Top Layer w0.254: v3(120.142,67.183) 120.904,67.945 120.904,68.961 121.143,69.2 U25.15@122.936,69.2 ; v3@120.142,67.373 ccw(c120.142,67.833) 120.467,67.508 ccw(c120.792,67.183) v3@120.332,67.183
  Bottom Layer w0.762: U24.4@51.841,64.414 50.14,64.414 49.149,65.405 49.149,70.485 50.622,71.958 66.573,71.958 71.73,66.802 119.761,66.802 ; 119.375,66.802 ccw(c119.375,67.95) v3@120.187,67.138 ; v3(120.142,67.183) 119.761,66.802 ; v3@120.204,67.172 cw(c119.761,67.253) 119.761,66.802
NetC23_2: C23.2 R92.1 U25.5 Y1.1 | length 22
  Top Layer w0.254: Y1.1@110.998,75.692 cw(c110.998,74.466) 111.865,75.333 cw(c112.732,76.2) Y1.1@111.506,76.2 ; Y1.1@110.998,76.2 112.998,74.2 U25.5@122.936,74.2
  Top Layer w0.762: R92.1@106.807,74.803 106.934,74.93 106.934,77.47 109.728,77.47 Y1.1@110.998,76.2
NetC24_2: C24.2 R92.2 U25.6 Y1.2 | length 22.1
  Top Layer w0.254: Y1.2@110.998,71.32 113.378,73.7 U25.6@122.936,73.7 ; Y1.2@110.998,71.828 ccw(c110.998,73.054) 111.865,72.187 ccw(c112.732,71.32) Y1.2@111.506,71.32
  Top Layer w0.762: R92.2@106.807,72.771 106.934,72.644 106.934,70.104 109.782,70.104 Y1.2@110.998,71.32
NetC81_1: C81.1 U25.47 | length 5.6
  Top Layer w0.254: U25.47@133.836,75.7 137.295,75.7 137.988,76.393 C81.1@137.988,77.546
NetC82_2: C82.2 U25.31 | length 11.7
  Top Layer w0.254: U25.31@131.636,67 131.636,65.163 132.105,64.694 135.407,64.694 136.246,63.856 C82.2@136.246,59.141
NetLED1_1: LED1.1 R84.1 | length 20.1
  Top Layer w0.508: LED1.1@37.033,78.994 37.084,78.943 v2(39.319,78.943) ; LED1.1@37.313,78.614 cw(c38.108,77.819) 38.108,78.943 ; LED1.1@37.313,79.174 ccw(c37.87,79.731) 37.87,78.943 ; v2@39.05,78.674 ccw(c38.399,78.023) 38.399,78.943 ccw(c38.399,79.863) v2@39.05,79.213
  Bottom Layer w0.508: v2@39.294,78.918 v2(39.319,78.943) 39.37,78.994 R84.1@51.501,78.994 ; v2@39.589,78.674 cw(c40.362,77.901) 40.362,78.994 ; v2@39.589,79.213 ccw(c40.116,79.74) 40.116,78.994 ; R84.1@51.278,78.771 ccw(c50.738,78.231) 50.738,78.994 ccw(c50.738,79.757) R84.1@51.278,79.217
NetLED2_1: LED2.1 R95.1 | length 17.3
  Top Layer w0.508: LED2.1@37.033,76.124 37.186,76.276 v2(39.218,76.276) ; LED2.1@37.313,75.944 cw(c38.116,75.141) 38.116,76.276 ; LED2.1@37.313,76.504 ccw(c37.863,77.053) 37.863,76.276
  Bottom Layer w0.508: v2(39.218,76.276) 39.268,76.327 R95.1@51.501,76.327 ; R95.1@51.278,76.104 ccw(c50.738,75.564) 50.738,76.327 ccw(c50.738,77.09) R95.1@51.278,76.55
NetLED3_2: LED3.2 R90.2 | length 3.6
  Top Layer w0.762: LED3.2@106.802,64.643 R90.2@110.429,64.643
NetQ1_1: Q1.1 R5.1 U2.12 | length 80
  Top Layer w0.508: v1(58.572,100.965) 58.572,99.695 59.715,98.552 v1(114.173,98.552)
  Bottom Layer w0.508: U2.12@58.547,98.885 58.547,100.94 v1(58.572,100.965) ; v1(114.173,98.552) 118.72,98.552 119.659,97.612 123.952,97.612 124.572,98.232 124.572,103.282 Q1.1@124.855,103.565 ; R5.1@124.323,98.883 cw(c123.722,98.282) 124.572,98.282 ; R5.1@124.323,99.39 ccw(c123.722,99.99) 124.572,99.99 ; 124.572,98.405 cw(c125.248,98.405) R5.1@124.77,98.883 ; 124.572,99.868 ccw(c125.248,99.868) R5.1@124.77,99.39 ; 124.572,101.434 cw(c126.736,101.434) Q1.1@125.206,102.964
NetQ2_1: Q2.1 R6.1 U1.16 | length 52.1
  Top Layer w0.508: v1(70.866,53.873) 70.866,52.197 71.12,51.943 v1@71.12,48.489
  Bottom Layer w0.508: Q2.1@37.354,48.293 ccw(c36.508,49.139) 37.705,49.139 ccw(c38.902,49.139) Q2.1@38.056,48.293 ; Q2.1@37.705,47.692 37.705,49.643 41.631,53.569 50.556,53.569 50.988,53.137 ; R6.1@50.79,52.425 ccw(c50.251,52.964) 51.013,52.964 ccw(c51.776,52.964) R6.1@51.237,52.425 ; R6.1@51.013,52.172 51.013,53.111 50.988,53.137 ; U1.16@68.628,48.641 71.069,48.641 71.171,48.539 v1(71.12,48.539) ; 70.568,48.641 cw(c70.568,47.988) v1@71.03,48.45 ; v1(70.866,53.873) 69.24,55.499 51.867,55.499 50.988,54.62 50.988,53.137
NetQ3_1: Q3.1 R7.1 U1.12 | length 66.3
  Top Layer w0.508: v1@76.733,37.719 cw(c76.733,36.554) 77.557,37.378 ; v1(76.733,37.846) 77.089,37.846 78.588,36.347 80.112,36.347 v1(80.112,36.601) ; 79.192,36.347 ccw(c79.192,37.521) v1@80.022,36.691 ; v1(89.967,36.347) 90.094,36.22 98.603,36.22 v1(99.72,37.338) ; v1@90.057,36.437 ccw(c90.58,36.961) 90.58,36.22
  Bottom Layer w0.508: U1.12@68.628,43.561 69.85,43.561 71.882,41.529 71.882,39.802 73.965,37.719 76.606,37.719 v1(76.733,37.846) ; U1.12@69.428,43.515 cw(c69.428,42.385) 70.227,43.184 ; 76.12,37.719 ccw(c76.12,38.459) v1@76.644,37.936 ; v1(80.112,36.601) 80.366,36.347 v1(89.967,36.347) ; v1@80.201,36.691 ccw(c81.031,37.521) 81.031,36.347 ; R7.1@97.633,42.368 cw(c97.093,41.828) 97.856,41.828 cw(c98.619,41.828) R7.1@98.079,42.368 ; R7.1@97.633,42.875 ccw(c97.093,43.414) 97.856,43.414 ccw(c98.619,43.414) R7.1@98.079,42.875 ; 99.162,36.297 ccw(c98.122,37.338) v1@99.593,37.338 ; v1(99.72,37.338) 99.72,36.855 99.009,36.144 97.307,36.144 96.596,36.855 96.596,39.37 97.856,40.63 R7.1@97.856,42.621 97.856,43.652 102.15,47.946 Q3.1@104.507,47.946 ; Q3.1@104.156,47.595 ccw(c103.31,46.749) 103.31,47.946 ccw(c103.31,49.143) Q3.1@104.156,48.297